# EAGLE board SignalMast-ColorLight-SingleHead_array (EAGLE 7.7.0)
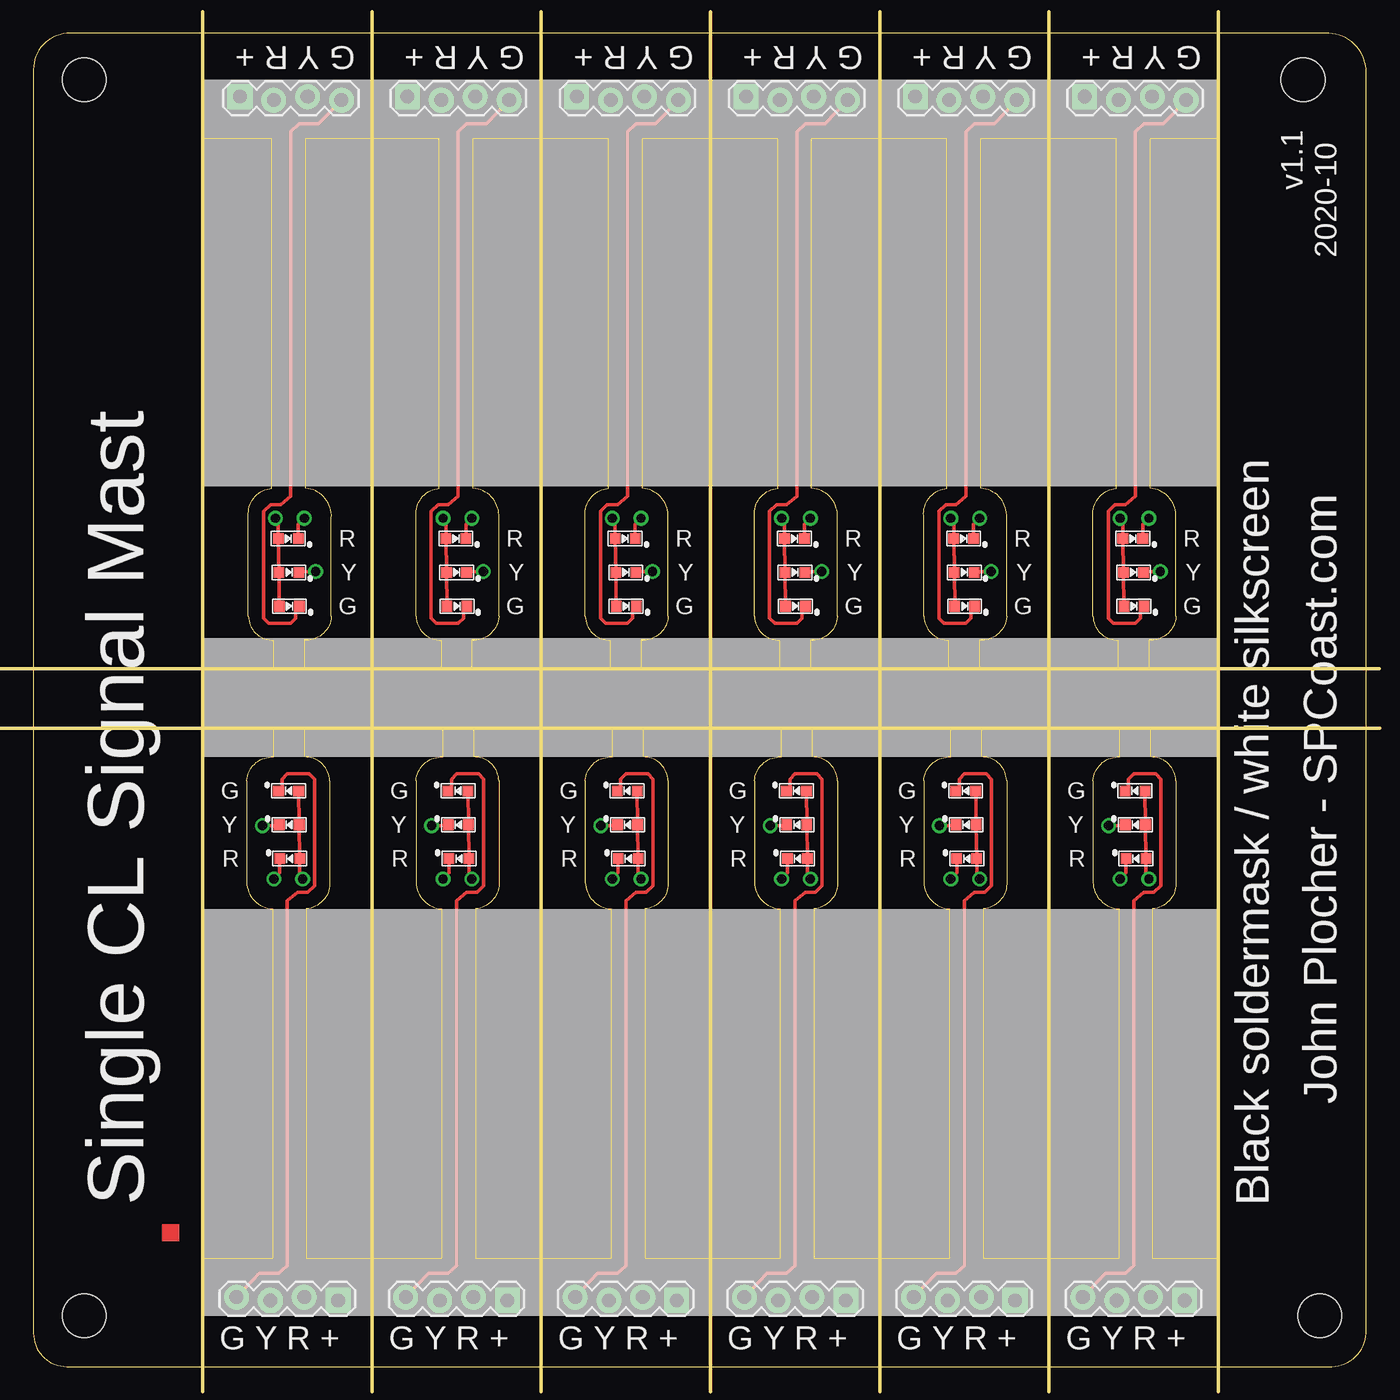
[diagram p0: board, top side]
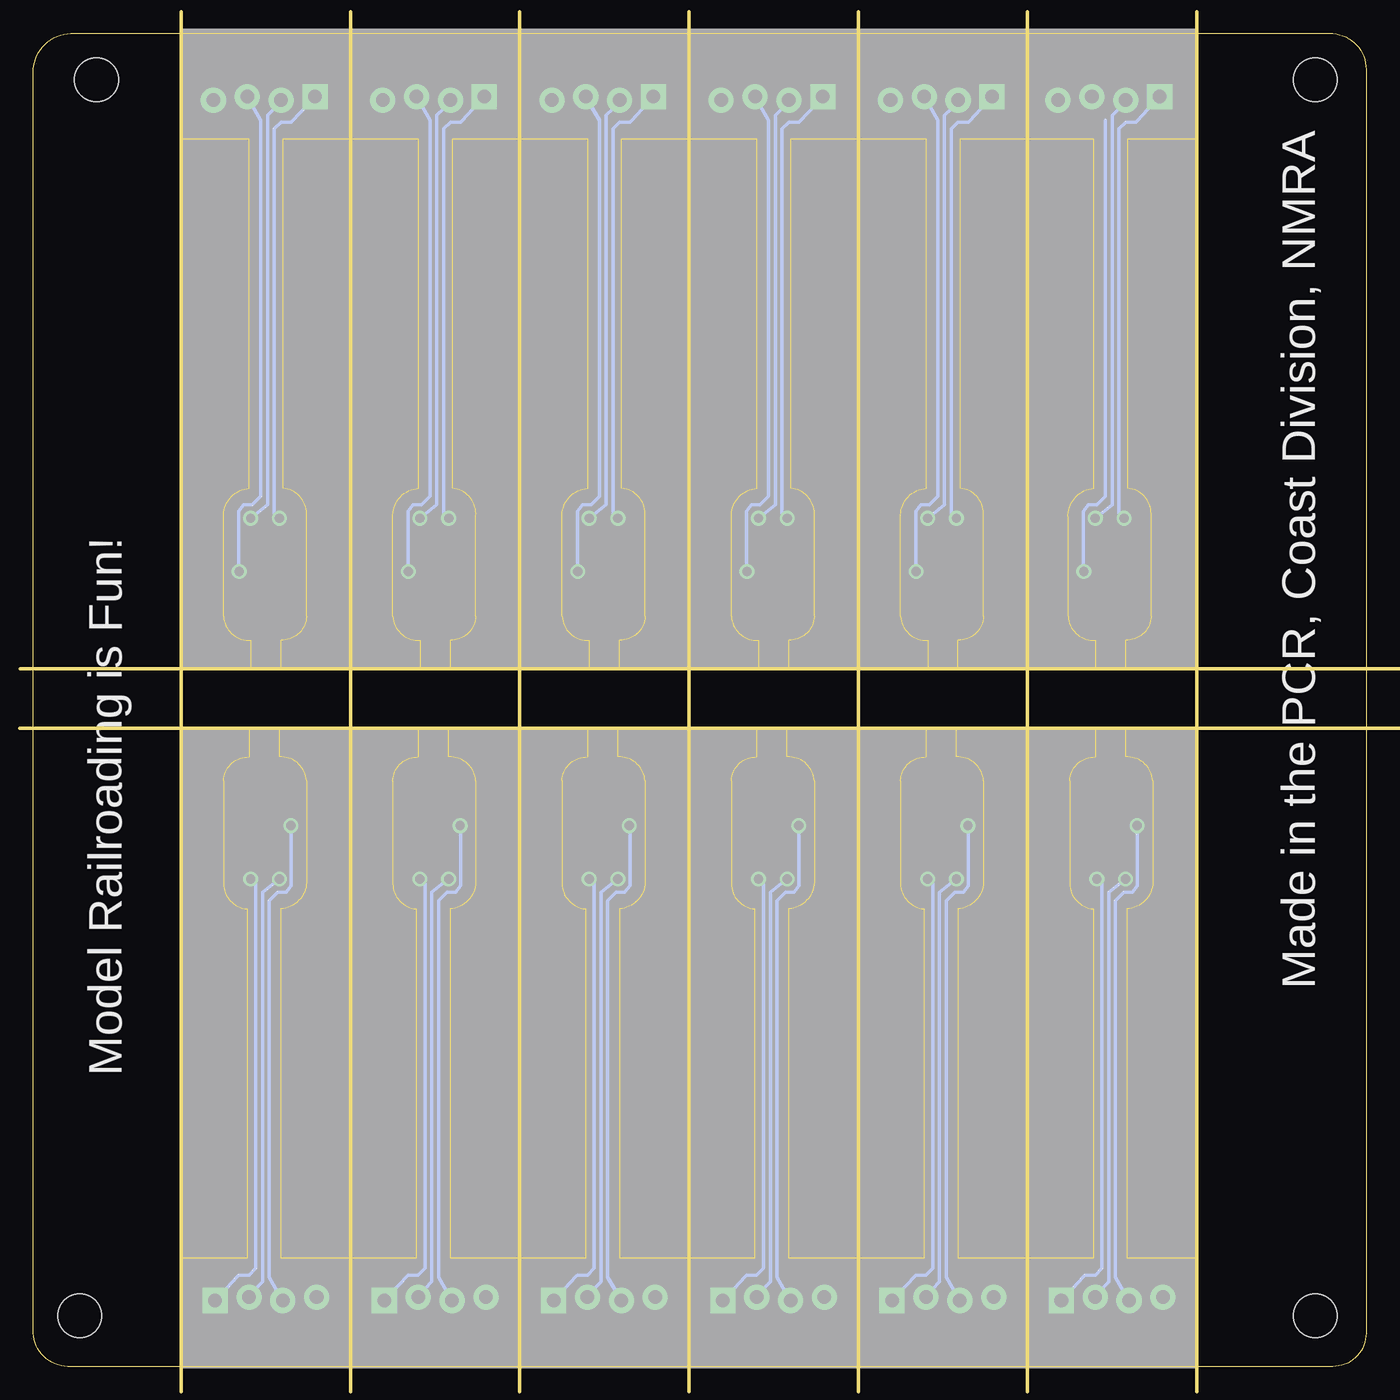
[diagram p1: board, bottom side, seen from below]

Size 100.01 x 100 mm. Coordinates in mm from the lower left corner, seen from the top.
Outline: 25.56,8.13 20.48,8.13 20.48,34.34 arc90 22.23,36.4 22.23,43.95 arc90 20.33,45.72 20.33,47.88 25.66,47.88
Outline: 25.41,8.13 30.64,8.13 30.64,34.34 arc-90 28.71,36.53 28.71,43.95 arc-90 30.74,45.72 30.74,47.88 25.41,47.88
Outline: 38.26,8.13 33.18,8.13 33.18,34.34 arc90 34.93,36.4 34.93,43.95 arc90 33.03,45.72 33.03,47.88 38.36,47.88
Outline: 38.11,8.13 43.34,8.13 43.34,34.34 arc-90 41.41,36.53 41.41,43.95 arc-90 43.44,45.72 43.44,47.88 38.11,47.88
Outline: 50.96,8.13 45.88,8.13 45.88,34.34 arc90 47.63,36.4 47.63,43.95 arc90 45.73,45.72 45.73,47.88 51.06,47.88
Outline: 50.81,8.13 56.04,8.13 56.04,34.34 arc-90 54.11,36.53 54.11,43.95 arc-90 56.14,45.72 56.14,47.88 50.81,47.88
Outline: 63.66,8.13 58.58,8.13 58.58,34.34 arc90 60.33,36.4 60.33,43.95 arc90 58.43,45.72 58.43,47.88 63.76,47.88
Outline: 63.51,8.13 68.74,8.13 68.74,34.34 arc-90 66.81,36.53 66.81,43.95 arc-90 68.84,45.72 68.84,47.88 63.51,47.88
Outline: 76.36,8.13 71.28,8.13 71.28,34.34 arc90 73.03,36.4 73.03,43.95 arc90 71.13,45.72 71.13,47.88 76.46,47.88
Outline: 76.21,8.13 81.44,8.13 81.44,34.34 arc-90 79.51,36.53 79.51,43.95 arc-90 81.54,45.72 81.54,47.88 76.21,47.88
Outline: 25.66,92.08 20.43,92.08 20.43,65.87 arc-90 22.36,63.68 22.36,56.26 arc-90 20.33,54.49 20.33,52.33 25.66,52.33
Outline: 38.24,92.08 33,92.08 33,65.87 arc-90 34.93,63.68 34.93,56.26 arc-90 32.9,54.49 32.9,52.33 38.24,52.33
Outline: 25.38,92.08 30.46,92.08 30.46,65.87 arc90 28.71,63.81 28.71,56.26 arc90 30.62,54.49 30.62,52.33 25.28,52.33
Outline: 50.94,92.08 45.7,92.08 45.7,65.87 arc-90 47.63,63.68 47.63,56.26 arc-90 45.6,54.49 45.6,52.33 50.94,52.33
Outline: 38.08,92.08 43.16,92.08 43.16,65.87 arc90 41.41,63.81 41.41,56.26 arc90 43.32,54.49 43.32,52.33 37.98,52.33
Outline: 63.64,92.08 58.4,92.08 58.4,65.87 arc-90 60.33,63.68 60.33,56.26 arc-90 58.3,54.49 58.3,52.33 63.64,52.33
Outline: 50.78,92.08 55.86,92.08 55.86,65.87 arc90 54.11,63.81 54.11,56.26 arc90 56.02,54.49 56.02,52.33 50.68,52.33
Outline: 76.34,92.08 71.1,92.08 71.1,65.87 arc-90 73.03,63.68 73.03,56.26 arc-90 71,54.49 71,52.33 76.34,52.33
Outline: 63.48,92.08 68.56,92.08 68.56,65.87 arc90 66.81,63.81 66.81,56.26 arc90 68.72,54.49 68.72,52.33 63.38,52.33
Outline: 76.18,92.08 81.26,92.08 81.26,65.87 arc90 79.51,63.81 79.51,56.26 arc90 81.42,54.49 81.42,52.33 76.08,52.33
Outline: 12.71,92.08 12.71,52.33 18.04,52.33 18.04,54.49 arc-90 16.14,56.26 16.14,63.81 arc-90 17.89,65.87 17.89,92.08 12.71,92.08
Outline: 12.71,47.88 12.71,8.13 17.94,8.13 17.94,34.34 arc-90 16.01,36.53 16.01,43.95 arc-90 18.04,45.72 18.04,47.88 12.71,47.88
Outline: 88.91,92.08 88.91,52.33 83.7,52.33 83.7,54.49 arc90 85.73,56.26 85.73,63.68 arc90 83.8,65.87 83.8,92.08 88.91,92.08
Outline: 88.91,47.88 88.91,8.13 83.98,8.13 83.98,34.34 arc90 85.73,36.4 85.73,43.95 arc90 83.83,45.72 83.83,47.88 88.91,47.88
Copper layers (1*16): Top 0.035mm / dielectric 1.5mm / Bottom 0.035mm
Design rules "default": minimum track width 10mil, minimum drill 24mil, track to track 8mil, track to pad 8mil, pad to pad 8mil, via to via 8mil, smd to smd 8mil, copper to edge 40mil, drill to drill 8mil, minimum pad ring 10mil, minimum via ring 8mil, stop-mask expansion 4mil, vias tented up to drill 0mil, thermal gap 10mil
Net classes: 0 default: width 0.203 mm
Holes 3.3 mm at 3.82,3.81 96.53,3.81 95.26,96.52 3.82,96.52
Milling: 23 lines

## Footprints (pad centres in the part's own frame; a part is rotated, then mirrored left to right if it is on the bottom)
1X04_LOCK = drill 1.016 pad 1.88 square: 1 0,0.127 | drill 1.016 pad 1.88: 2 2.54,-0.127; 3 5.08,0.127; 4 7.62,-0.127
0603-LED = smd 0.8 x 0.8: A 0.75,0; C -0.75,0

## Placement (x,y rotation side)
BOARD1  BOARD  [BOARD-SEEED10X10-NOHOLES]  0.01,0 0 top
GYR+  0.100  [1X04_LOCK]  22.87,5.08 180 top
GYR+1  0.100  [1X04_LOCK]  35.57,5.08 180 top
GYR+2  0.100  [1X04_LOCK]  48.27,5.08 180 top
GYR+3  0.100  [1X04_LOCK]  60.97,5.08 180 top
GYR+4  0.100  [1X04_LOCK]  73.67,5.08 180 top
GYR+5  0.100  [1X04_LOCK]  86.37,5.08 180 top
GYR+6  0.100  [1X04_LOCK]  15.5,95.13 0 top
GYR+7  0.100  [1X04_LOCK]  28.08,95.13 0 top
GYR+8  0.100  [1X04_LOCK]  40.78,95.13 0 top
GYR+9  0.100  [1X04_LOCK]  53.48,95.13 0 top
GYR+10  0.100  [1X04_LOCK]  66.18,95.13 0 top
GYR+11  0.100  [1X04_LOCK]  78.88,95.13 0 top
LED1  R  [0603-LED]  19.24,38.1 0 top
LED2  Y  [0603-LED]  19.19,40.64 0 top
LED3  G  [0603-LED]  19.16,43.18 0 top
LED4  R  [0603-LED]  31.94,38.1 0 top
LED5  Y  [0603-LED]  31.89,40.64 0 top
LED6  G  [0603-LED]  31.86,43.18 0 top
LED7  R  [0603-LED]  44.64,38.1 0 top
LED8  Y  [0603-LED]  44.59,40.64 0 top
LED9  G  [0603-LED]  44.56,43.18 0 top
LED10  R  [0603-LED]  57.34,38.1 0 top
LED11  Y  [0603-LED]  57.29,40.64 0 top
LED12  G  [0603-LED]  57.26,43.18 0 top
LED13  R  [0603-LED]  70.04,38.1 0 top
LED14  Y  [0603-LED]  69.99,40.64 0 top
LED15  G  [0603-LED]  69.96,43.18 0 top
LED16  R  [0603-LED]  82.74,38.1 0 top
LED17  Y  [0603-LED]  82.69,40.64 0 top
LED18  G  [0603-LED]  82.66,43.18 0 top
LED19  R  [0603-LED]  19.13,62.11 180 top
LED20  Y  [0603-LED]  19.18,59.57 180 top
LED21  G  [0603-LED]  19.21,57.03 180 top
LED22  R  [0603-LED]  31.71,62.11 180 top
LED23  Y  [0603-LED]  31.75,59.57 180 top
LED24  G  [0603-LED]  31.79,57.03 180 top
LED25  R  [0603-LED]  44.41,62.11 180 top
LED26  Y  [0603-LED]  44.45,59.57 180 top
LED27  G  [0603-LED]  44.49,57.03 180 top
LED28  R  [0603-LED]  57.11,62.11 180 top
LED29  Y  [0603-LED]  57.15,59.57 180 top
LED30  G  [0603-LED]  57.19,57.03 180 top
LED31  R  [0603-LED]  69.81,62.11 180 top
LED32  Y  [0603-LED]  69.85,59.57 180 top
LED33  G  [0603-LED]  69.89,57.03 180 top
LED34  R  [0603-LED]  82.51,62.11 180 top
LED35  Y  [0603-LED]  82.55,59.57 180 top
LED36  G  [0603-LED]  82.59,57.03 180 top

## Library data of the parts
BOARD1 GYR+ GYR+1-GYR+11 = SPCoast
LED1 LED4 LED7 LED10 LED13 LED16 LED19 LED22 LED25 LED28 LED31 LED34 = SPCoast; OPL: 19-217-R6C-AL1M2VY-3T
LED2 LED5 LED8 LED11 LED14 LED17 LED20 LED23 LED26 LED29 LED32 LED35 = SPCoast; OPL: 19-217-Y5C-AM1N1VY-3T
LED3 LED6 LED9 LED12 LED15 LED18 LED21 LED24 LED27 LED30 LED33 LED36 = SPCoast; OPL: 19-217-G7C-AN1P2-3T

## Nets
BG: GYR+.4 LED3.C
BG1: GYR+1.4 LED6.C
BG2: GYR+2.4 LED9.C
BG3: GYR+3.4 LED12.C
BG4: GYR+4.4 LED15.C
BG5: GYR+5.4 LED18.C
BG6: GYR+6.4 LED21.C
BG7: GYR+7.4 LED24.C
BG8: GYR+8.4 LED27.C
BG9: GYR+9.4 LED30.C
BG10: GYR+10.4 LED33.C
BG11: GYR+11.4 LED36.C
BR: GYR+.2 LED1.C
BR1: GYR+1.2 LED4.C
BR2: GYR+2.2 LED7.C
BR3: GYR+3.2 LED10.C
BR4: GYR+4.2 LED13.C
BR5: GYR+5.2 LED16.C
BR6: GYR+6.2 LED19.C
BR7: LED22.C
BR8: GYR+8.2 LED25.C
BR9: GYR+9.2 LED28.C
BR10: GYR+10.2 LED31.C
BR11: GYR+11.2 LED34.C
BV+: GYR+.1 LED1.A LED2.A LED3.A
BV+1: GYR+1.1 LED4.A LED5.A LED6.A
BV+2: GYR+2.1 LED7.A LED8.A LED9.A
BV+3: GYR+3.1 LED10.A LED11.A LED12.A
BV+4: GYR+4.1 LED13.A LED14.A LED15.A
BV+5: GYR+5.1 LED16.A LED17.A LED18.A
BV+6: GYR+6.1 LED19.A LED20.A LED21.A
BV+7: GYR+7.1 LED22.A LED23.A LED24.A
BV+8: GYR+8.1 LED25.A LED26.A LED27.A
BV+9: GYR+9.1 LED28.A LED29.A LED30.A
BV+10: GYR+10.1 LED31.A LED32.A LED33.A
BV+11: GYR+11.1 LED34.A LED35.A LED36.A
BY: GYR+.3 LED2.C
BY1: GYR+1.3 LED5.C
BY2: GYR+2.3 LED8.C
BY3: GYR+3.3 LED11.C
BY4: GYR+4.3 LED14.C
BY5: GYR+5.3 LED17.C
BY6: LED20.C
BY7: GYR+7.3 LED23.C
BY8: GYR+8.3 LED26.C
BY9: GYR+9.3 LED29.C
BY10: GYR+10.3 LED32.C
BY11: GYR+11.3 LED35.C

## Tracks (layer width: path | path; a pad name or v marks a point on that pad's centre or on a via)
BG
  Top 0.254: GYR+.4 16.95,6.99 18.42,6.99 19.06,7.58 19.06,34.93 19.82,35.56 20.58,35.56 21.09,36.07 21.09,44.07 20.71,44.45 19.06,44.45 18.68,44.07 18.68,43.09 LED3.C
BG1
  Top 0.254: GYR+1.4 29.65,6.99 31.12,6.99 31.76,7.58 31.76,34.93 32.52,35.56 33.28,35.56 33.79,36.07 33.79,44.07 33.41,44.45 31.76,44.45 31.38,44.07 31.38,43.09 LED6.C
BG2
  Top 0.254: GYR+2.4 42.35,6.99 43.82,6.99 44.46,7.58 44.46,34.93 45.22,35.56 45.98,35.56 46.49,36.07 46.49,44.07 46.11,44.45 44.46,44.45 44.08,44.07 44.08,43.09 LED9.C
BG3
  Top 0.254: GYR+3.4 55.05,6.99 56.52,6.99 57.16,7.58 57.16,34.93 57.92,35.56 58.68,35.56 59.19,36.07 59.19,44.07 58.81,44.45 57.16,44.45 56.78,44.07 56.78,43.09 LED12.C
BG4
  Top 0.254: GYR+4.4 67.75,6.99 69.22,6.99 69.86,7.58 69.86,34.93 70.62,35.56 71.38,35.56 71.89,36.07 71.89,44.07 71.51,44.45 69.86,44.45 69.48,44.07 69.48,43.09 LED15.C
BG5
  Top 0.254: GYR+5.4 80.45,6.99 81.92,6.99 82.56,7.58 82.56,34.93 83.32,35.56 84.08,35.56 84.59,36.07 84.59,44.07 84.21,44.45 82.56,44.45 82.18,44.07 82.18,43.09 LED18.C
BG6
  Top 0.254: GYR+6.4 21.42,93.22 19.95,93.22 19.31,92.63 19.31,65.28 18.55,64.65 17.79,64.65 17.28,64.14 17.28,56.14 17.66,55.76 19.31,55.76 19.69,56.14 19.69,57.12 LED21.C
BG7
  Top 0.254: GYR+7.4 34,93.22 32.52,93.22 31.89,92.63 31.89,65.28 31.12,64.65 30.36,64.65 29.85,64.14 29.85,56.14 30.24,55.76 31.89,55.76 32.27,56.14 32.27,57.12 LED24.C
BG8
  Top 0.254: GYR+8.4 46.7,93.22 45.22,93.22 44.59,92.63 44.59,65.28 43.82,64.65 43.06,64.65 42.55,64.14 42.55,56.14 42.94,55.76 44.59,55.76 44.97,56.14 44.97,57.12 LED27.C
BG9
  Top 0.254: GYR+9.4 59.4,93.22 57.92,93.22 57.29,92.63 57.29,65.28 56.52,64.65 55.76,64.65 55.25,64.14 55.25,56.14 55.64,55.76 57.29,55.76 57.67,56.14 57.67,57.12 LED30.C
BG10
  Top 0.254: GYR+10.4 72.1,93.22 70.62,93.22 69.99,92.63 69.99,65.28 69.22,64.65 68.46,64.65 67.95,64.14 67.95,56.14 68.34,55.76 69.99,55.76 70.37,56.14 70.37,57.12 LED33.C
BG11
  Top 0.254: GYR+11.4 84.8,93.22 83.32,93.22 82.69,92.63 82.69,65.28 81.92,64.65 81.16,64.65 80.65,64.14 80.65,56.14 81.04,55.76 82.69,55.76 83.07,56.14 83.07,57.12 LED36.C
BR  (via drill 0.7)
  Top 0.254: LED1.C 18.49,37.03 v18.04,36.58
  Bottom 0.254: GYR+.2 19.82,5.07 19.82,5.85 19.31,6.35 19.31,35.56 v18.04,36.58
BR1  (via drill 0.7)
  Top 0.254: LED4.C 31.19,37.03 v30.74,36.58
  Bottom 0.254: GYR+1.2 32.52,5.07 32.52,5.85 32.01,6.35 32.01,35.56 v30.74,36.58
BR2  (via drill 0.7)
  Top 0.254: LED7.C 43.89,37.03 v43.44,36.58
  Bottom 0.254: GYR+2.2 45.22,5.07 45.22,5.85 44.71,6.35 44.71,35.56 v43.44,36.58
BR3  (via drill 0.7)
  Top 0.254: LED10.C 56.59,37.03 v56.14,36.58
  Bottom 0.254: GYR+3.2 57.92,5.07 57.92,5.85 57.41,6.35 57.41,35.56 v56.14,36.58
BR4  (via drill 0.7)
  Top 0.254: LED13.C 69.29,37.03 v68.84,36.58
  Bottom 0.254: GYR+4.2 70.62,5.07 70.62,5.85 70.11,6.35 70.11,35.56 v68.84,36.58
BR5  (via drill 0.7)
  Top 0.254: LED16.C 81.99,37.03 v81.54,36.58
  Bottom 0.254: GYR+5.2 83.32,5.07 83.32,5.85 82.81,6.35 82.81,35.56 v81.54,36.58
BR6  (via drill 0.7)
  Top 0.254: LED19.C 19.88,63.18 v20.33,63.63
  Bottom 0.254: GYR+6.2 18.55,95.14 18.55,94.36 19.06,93.86 19.06,64.65 v20.33,63.63
BR7  (via drill 0.7)
  Top 0.254: LED22.C 32.46,63.18 v32.9,63.63
  Bottom 0.254: 31.12,95.14 31.12,94.36 31.63,93.86 31.63,64.65 v32.9,63.63
BR8  (via drill 0.7)
  Top 0.254: LED25.C 45.16,63.18 v45.6,63.63
  Bottom 0.254: GYR+8.2 43.82,95.14 43.82,94.36 44.33,93.86 44.33,64.65 v45.6,63.63
BR9  (via drill 0.7)
  Top 0.254: LED28.C 57.86,63.18 v58.3,63.63
  Bottom 0.254: GYR+9.2 56.52,95.14 56.52,94.36 57.03,93.86 57.03,64.65 v58.3,63.63
BR10  (via drill 0.7)
  Top 0.254: LED31.C 70.56,63.18 v71,63.63
  Bottom 0.254: GYR+10.2 69.22,95.14 69.22,94.36 69.73,93.86 69.73,64.65 v71,63.63
BR11  (via drill 0.7)
  Top 0.254: LED34.C 83.26,63.18 v83.7,63.63
  Bottom 0.254: GYR+11.2 81.92,95.14 81.92,94.36 82.43,93.86 82.43,64.65 v83.7,63.63
BV+  (via drill 0.7)
  Top 0.254: 20.2,37.91 LED1.A | LED3.A LED2.A LED1.A | v20.2,36.58 19.99,36.79 LED1.A
  Bottom 0.254: GYR+.1 21.17,6.78 21.09,6.86 20.33,6.86 19.82,7.37 19.82,36.2 v20.2,36.58
BV+1  (via drill 0.7)
  Top 0.254: 32.9,37.91 LED4.A | LED6.A LED5.A LED4.A | v32.9,36.58 32.69,36.79 LED4.A
  Bottom 0.254: GYR+1.1 33.87,6.78 33.79,6.86 33.03,6.86 32.52,7.37 32.52,36.2 v32.9,36.58
BV+2  (via drill 0.7)
  Top 0.254: 45.6,37.91 LED7.A | LED9.A LED8.A LED7.A | v45.6,36.58 45.39,36.79 LED7.A
  Bottom 0.254: GYR+2.1 46.57,6.78 46.49,6.86 45.73,6.86 45.22,7.37 45.22,36.2 v45.6,36.58
BV+3  (via drill 0.7)
  Top 0.254: 58.3,37.91 LED10.A | LED12.A LED11.A LED10.A | v58.3,36.58 58.09,36.79 LED10.A
  Bottom 0.254: GYR+3.1 59.27,6.78 59.19,6.86 58.43,6.86 57.92,7.37 57.92,36.2 v58.3,36.58
BV+4  (via drill 0.7)
  Top 0.254: 71,37.91 LED13.A | LED15.A LED14.A LED13.A | v71,36.58 70.79,36.79 LED13.A
  Bottom 0.254: GYR+4.1 71.97,6.78 71.89,6.86 71.13,6.86 70.62,7.37 70.62,36.2 v71,36.58
BV+5  (via drill 0.7)
  Top 0.254: 83.7,37.91 LED16.A | LED18.A LED17.A LED16.A | v83.7,36.58 83.49,36.79 LED16.A
  Bottom 0.254: GYR+5.1 84.67,6.78 84.59,6.86 83.83,6.86 83.32,7.37 83.32,36.2 v83.7,36.58
BV+6  (via drill 0.7)
  Top 0.254: 18.17,62.3 LED19.A | LED21.A LED20.A LED19.A | v18.17,63.63 18.38,63.42 LED19.A
  Bottom 0.254: GYR+6.1 17.2,93.43 17.28,93.35 18.04,93.35 18.55,92.84 18.55,64.01 v18.17,63.63
BV+7  (via drill 0.7)
  Top 0.254: 30.74,62.3 LED22.A | LED24.A LED23.A LED22.A | v30.74,63.63 30.96,63.42 LED22.A
  Bottom 0.254: GYR+7.1 29.78,93.43 29.85,93.35 30.62,93.35 31.12,92.84 31.12,64.01 v30.74,63.63
BV+8  (via drill 0.7)
  Top 0.254: 43.44,62.3 LED25.A | LED27.A LED26.A LED25.A | v43.44,63.63 43.66,63.42 LED25.A
  Bottom 0.254: GYR+8.1 42.48,93.43 42.55,93.35 43.32,93.35 43.82,92.84 43.82,64.01 v43.44,63.63
BV+9  (via drill 0.7)
  Top 0.254: 56.14,62.3 LED28.A | LED30.A LED29.A LED28.A | v56.14,63.63 56.36,63.42 LED28.A
  Bottom 0.254: GYR+9.1 55.18,93.43 55.25,93.35 56.02,93.35 56.52,92.84 56.52,64.01 v56.14,63.63
BV+10  (via drill 0.7)
  Top 0.254: 68.84,62.3 LED31.A | LED33.A LED32.A LED31.A | v68.84,63.63 69.06,63.42 LED31.A
  Bottom 0.254: GYR+10.1 67.88,93.43 67.95,93.35 68.72,93.35 69.22,92.84 69.22,64.01 v68.84,63.63
BV+11  (via drill 0.7)
  Top 0.254: 81.54,62.3 LED34.A | LED36.A LED35.A LED34.A | v81.54,63.63 81.76,63.42 LED34.A
  Bottom 0.254: GYR+11.1 80.58,93.43 80.65,93.35 81.42,93.35 81.92,92.84 81.92,64.01 v81.54,63.63
BY  (via drill 0.7)
  Top 0.254: v17.19,40.57 18.69,40.57 LED2.C
  Bottom 0.254: GYR+.3 18.81,6.72 18.81,34.93 18.17,35.56 17.54,35.56 17.15,36.07 17.15,40.01 v17.19,40.57
BY1  (via drill 0.7)
  Top 0.254: v29.89,40.57 31.39,40.57 LED5.C
  Bottom 0.254: GYR+1.3 31.51,6.72 31.51,34.93 30.87,35.56 30.24,35.56 29.85,36.07 29.85,40.01 v29.89,40.57
BY2  (via drill 0.7)
  Top 0.254: v42.59,40.57 44.09,40.57 LED8.C
  Bottom 0.254: GYR+2.3 44.21,6.72 44.21,34.93 43.57,35.56 42.94,35.56 42.55,36.07 42.55,40.01 v42.59,40.57
BY3  (via drill 0.7)
  Top 0.254: v55.29,40.57 56.79,40.57 LED11.C
  Bottom 0.254: GYR+3.3 56.91,6.72 56.91,34.93 56.27,35.56 55.64,35.56 55.25,36.07 55.25,40.01 v55.29,40.57
BY4  (via drill 0.7)
  Top 0.254: v67.99,40.57 69.49,40.57 LED14.C
  Bottom 0.254: GYR+4.3 69.61,6.72 69.61,34.93 68.97,35.56 68.34,35.56 67.95,36.07 67.95,40.01 v67.99,40.57
BY5  (via drill 0.7)
  Top 0.254: v80.69,40.57 82.19,40.57 LED17.C
  Bottom 0.254: GYR+5.3 82.31,6.72 82.31,34.93 81.67,35.56 81.04,35.56 80.65,36.07 80.65,40.01 v80.69,40.57
BY6  (via drill 0.7)
  Top 0.254: v21.19,59.64 19.68,59.64 LED20.C
  Bottom 0.254: 19.57,93.49 19.57,65.28 20.2,64.65 20.84,64.65 21.22,64.14 21.22,60.2 v21.19,59.64
BY7  (via drill 0.7)
  Top 0.254: v33.76,59.64 32.26,59.64 LED23.C
  Bottom 0.254: GYR+7.3 32.14,93.49 32.14,65.28 32.78,64.65 33.41,64.65 33.79,64.14 33.79,60.2 v33.76,59.64
BY8  (via drill 0.7)
  Top 0.254: v46.46,59.64 44.96,59.64 LED26.C
  Bottom 0.254: GYR+8.3 44.84,93.49 44.84,65.28 45.48,64.65 46.11,64.65 46.49,64.14 46.49,60.2 v46.46,59.64
BY9  (via drill 0.7)
  Top 0.254: v59.16,59.64 57.66,59.64 LED29.C
  Bottom 0.254: GYR+9.3 57.54,93.49 57.54,65.28 58.18,64.65 58.81,64.65 59.19,64.14 59.19,60.2 v59.16,59.64
BY10  (via drill 0.7)
  Top 0.254: v71.86,59.64 70.36,59.64 LED32.C
  Bottom 0.254: GYR+10.3 70.24,93.49 70.24,65.28 70.88,64.65 71.51,64.65 71.89,64.14 71.89,60.2 v71.86,59.64
BY11  (via drill 0.7)
  Top 0.254: v84.56,59.64 83.06,59.64 LED35.C
  Bottom 0.254: GYR+11.3 82.94,93.49 82.94,65.28 83.58,64.65 84.21,64.65 84.59,64.14 84.59,60.2 v84.56,59.64
(copper drawn outside any net)
  shapes: Top area x1

## Text on the board
tPlace: G Y R + | G Y R + | G Y R + | G Y R + | G Y R + | G Y R + | v1.1 | 2020-10 | John Plocher - SPCoast.com | Single CL Signal Mast | Black soldermask / white silkscreen | G Y R + | G Y R + | G Y R + | G Y R + | G Y R + | G Y R +
bPlace: Made in the PCR, Coast Division, NMRA | Model Railroading is Fun!
Milling: V-SCORE | V-SCORE | V-SCORE | V-SCORE | V-SCORE | V-SCORE | V-SCORE | V-SCORE | V-SCORE